# Altium PCB 123.PcbDoc
Units mm, origin at the board's own origin, x right, y up, seen from the top; angles counter-clockwise.
Board outline 152.4 x 101.6 mm, 2 copper layers (Top Layer, Bottom Layer); 33 components, 20 nets, 71 pads, 8 vias.
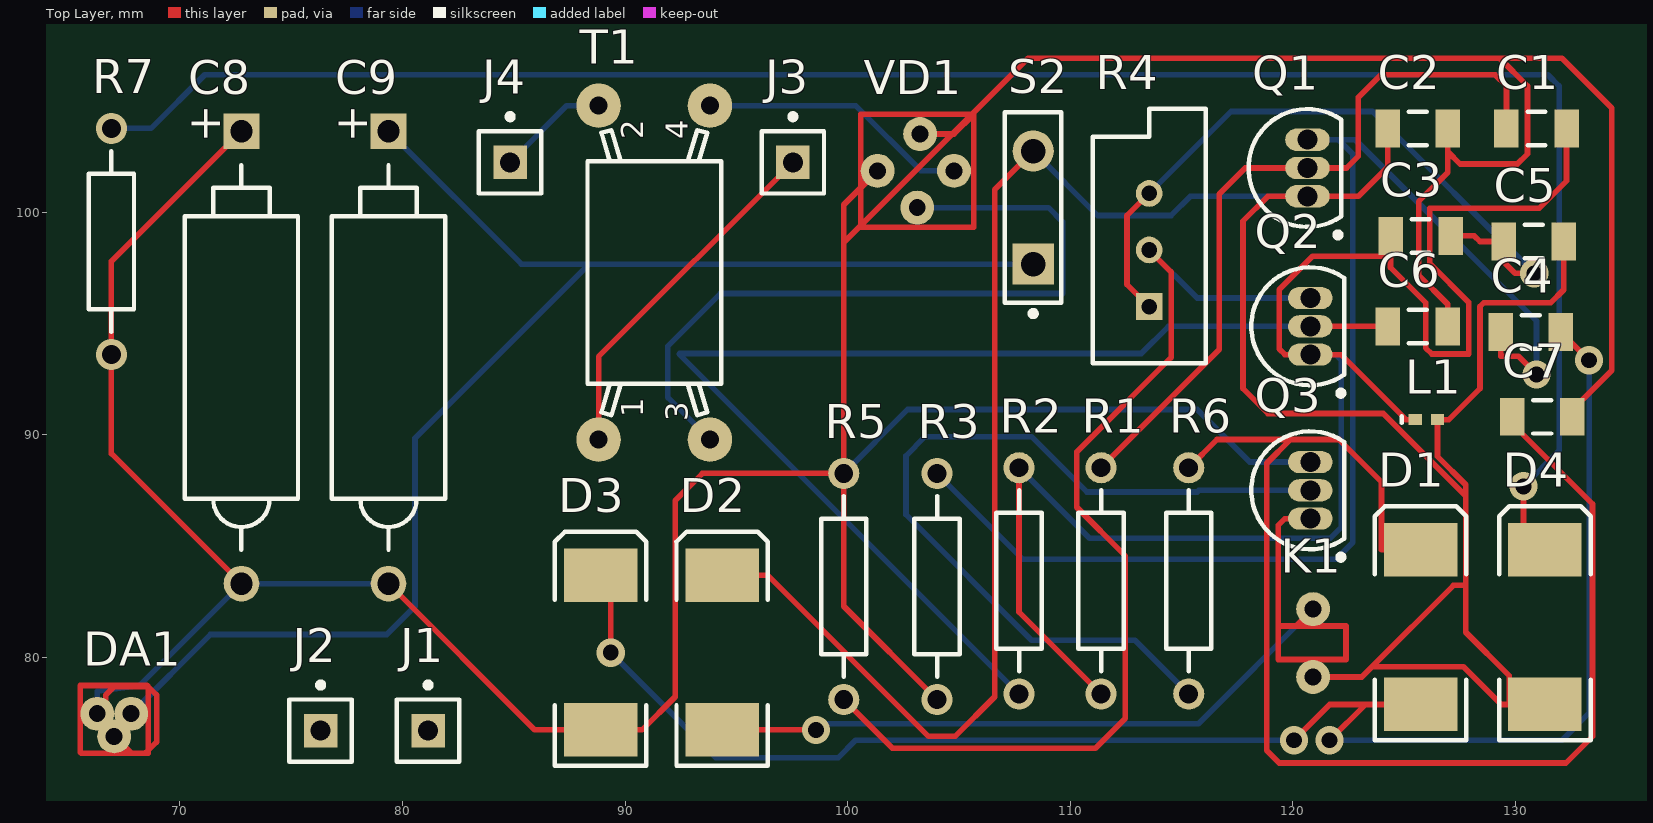
[diagram p0: Top Layer view]
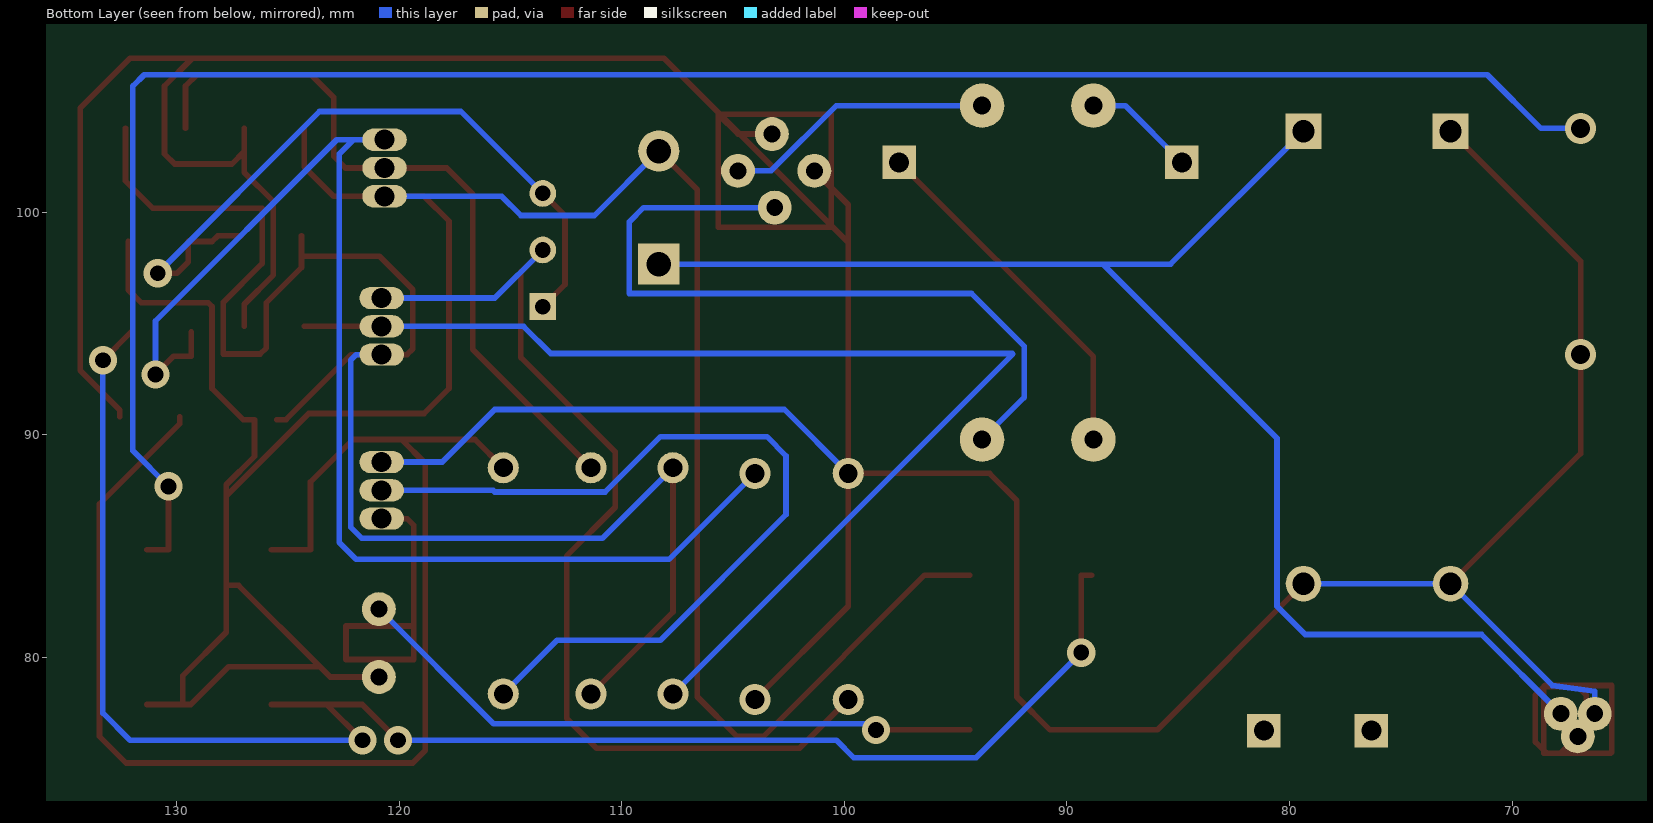
[diagram p1: Bottom Layer view, seen from below]

## Layer stack, top to bottom
Top Solder: solder mask 0.0102, Solder Resist, Dk 3.5
Top Layer: signal copper 0.0356
Dielectric 1: dielectric 0.32, FR-4, Dk 4.8
Bottom Layer: signal copper 0.0356
Bottom Solder: solder mask 0.0102, Solder Resist, Dk 3.5

## Board outline
25.4,25.4 177.8,25.4 177.8,127 25.4,127

## Design rules (kind name [scope] priority, off if disabled: settings)
Clearance [All] p1: gap=0.254 ignorepadtopadclearanceinfootprint=FALSE except(0: Arc-Hole Track-Hole SMDPad-Hole THPad-Hole Via-Hole Fill-Hole Poly-Hole Region-Hole Text-Hole)
PolygonConnect [All] p1: connectstyle=Relief reliefconductorwidth=0.254 reliefentries=4 polygonreliefangle="90 Angle" airgapwidth=0.254
RoutingVias [All] p1: holewidth=0.711 width=1.27 viastyle="Through Hole" minholewidth=0.711 minwidth=1.27 maxholewidth=0.711 maxwidth=1.27
SolderMaskExpansion [All] p1: expansion=0.102 istentingtop=FALSE
Width [All] p1: maxlimit=0.254 minlimit=0.254 preferedwidth=0.254
30 further rules are at their usual default settings.

## Components (designator, comment, footprint, x,y, rotation, side; value= is the part's Value field where it differs from the comment)
C1 "Cap Semi" C1206 130.937,103.759 r0 top value=100pF
C2 "Cap Semi" C1206 125.603,103.759 r0 top value=100pF
C3 "Cap Semi" C1206 125.73,98.933 r0 top value=100pF
C4 "Cap Semi" C1206 130.683,94.615 r0 top value=100pF
C5 "Cap Semi" C1206 130.81,98.679 r0 top value=100pF
C6 "Cap Semi" C1206 125.603,94.869 r0 top value=100pF
C7 "Cap Semi" C1206 131.191,90.805 r0 top value=100pF
C8 "Cap Pol2" POLAR0.8 72.771,93.472 r90 top value=100pF
C9 "Cap Pol2" POLAR0.8 79.375,93.472 r90 top value=100pF
D1 "Diode" SMC 125.73,81.361 r90 top
D2 "Diode" SMC 94.361,80.218 r90 top
D3 "Diode" SMC 88.9,80.218 r90 top
D4 "Diode" SMC 131.318,81.361 r90 top
DA1 "KP142EH8B" "PCBComponent_1 - duplicate" 66.167,78.105 r0 top
J1 "Socket" PIN1 81.153,76.708 r0 top
J2 "Socket" PIN1 76.327,76.708 r0 top
J3 "Socket" PIN1 97.536,102.235 r0 top
J4 "Socket" PIN1 84.836,102.235 r0 top
K1 "PEC16" "PCBComponent_1 - duplicate1" 120.142,80.645 r0 top
L1 "Inductor" 0402-A 125.992,90.678 r0 top value=10mH
Q1 "NPN" TO-226-AA 120.65,101.981 r0 top
Q2 "NPN" TO-226-AA 120.777,94.869 r0 top
Q3 "NPN" TO-226-AA 120.777,87.503 r0 top
R1 "Res2" AXIAL-0.4 111.379,83.439 r90 top value=1K
R2 "Res2" AXIAL-0.4 107.696,83.439 r90 top value=1K
R3 "Res2" AXIAL-0.4 104.013,83.185 r90 top value=1K
R4 "RPot" VR5 113.538,98.298 r90 top value=1K
R5 "Res2" AXIAL-0.4 99.822,83.185 r90 top value=1K
R6 "Res2" AXIAL-0.4 115.316,83.439 r90 top value=1K
R7 "Res2" AXIAL-0.4 66.929,98.679 r90 top value=1K
S2 "SW-SPST" SPST-2 108.331,100.203 r90 top
T1 "Trans" TRANS 91.313,97.282 r90 top
VD1 "КЦ405A" PCBComponent_1 101.346,102.743 r0 top

## Footprints (in the part's own frame and the unit in brackets; to place one, negate y for a bottom-side part, rotate by r counter-clockwise, add the part's x,y. Pads: shape width x height; smd on the part's side, far side on the other; paste and mask are expansions set on the pad)
0402-A [mm] "Chip Inductor, Body 1.0x0.5mm, IPC High Density"
  rect 0.6x0.5 smd: 1(-0.5,0) 2(0.5,0)
  silkscreen extent -1.1,-0.15 -1.1,0.15, body extent -0.55,-0.3 0.55,0.3, height 0.55
AXIAL-0.4 [mm] "Axial Device, Thru-Hole; 2 Leads; 0.4 in Pin Spacing"
  round 1.4 hole 0.85: 1(-5.08,0) 2(5.08,0)
  silkscreen extent -4.06,-1.02 4.06,1.02
C1206 [mm] "Chip Capacitor, Body 3.2x1.6mm, IPC High Density"
  rect 1.1x1.7 smd: 1(-1.35,0) 2(1.35,0)
  silkscreen extent -0.4,-0.75 0.4,0.75, body extent -1.7,-0.9 1.7,0.9, height 1.3
PCBComponent_1 [mil]
  round 60 hole 30: 1(0,-35) 2(75,30) 3(135,-35) 4(70,-100)
  Top Layer lines w10: -30,-135 -30,-131.85 -30,-65 -30,-35 -30,61.85 ; -30,65 75,65 166.85,65 ; -26.85,-135 170,-135 ; 170,-131.85 170,65
"PCBComponent_1 - duplicate" [mil]
  round 60 hole 30: 1(5,-25) 2(35,-65) 3(65,-25)
  Top Layer lines w10: -25,-93.11 -25,-25 -25,25 93.11,25 ; -23.11,-95 35,-95 65,-95 90,-95 95,-95 95,-90 95,23.11
"PCBComponent_1 - duplicate1" [mil]
  round 60 hole 30: 1(30,60) 2(30,-60)
  Top Layer lines w10: -31.89,-29.06 -31.89,30 ; -30,-29.06 88.11,-29.06 88.11,30 30,30 0,30 -30,30
PIN1 [mm] "Connector; Plug"
  rect 1.5x1.5 hole 0.9: 1(0,0)
  silkscreen extent -1.4,-1.4 1.4,2.17
POLAR0.8 [mm] "Polarized Capacitor; 2 Leads"
  rect 1.6x1.6 hole 1: 1(10.16,0)
  round 1.6 hole 1: 2(-10.16,0)
  silkscreen extent -8.64,-2.54 8.64,2.54
SMC [mm] "DO-214-AB/SMC; 2 C-Bend Leads; Body 7.9 x 5.9 mm, inc. leads (LxW)"
  rect 2.4x3.3 smd: 1(-3.475,0) 2(3.475,0)
  silkscreen extent -5.07,-2.05 5.43,2.06
SPST-2 [mm] "Switch; 2 Leads"
  rect 1.85x1.85 hole 1.1: 1(-2.54,0)
  round 1.85 hole 1.1: 2(2.54,0)
  silkscreen extent -4.89,-1.27 4.28,1.27
TO-226-AA [mm] "TO, Flat Index; 3 In-Line, Axial Leads; Body Dia. 4.8mm; Leads 0.55 x 0.51 mm (max)"
  oval 2x1 hole 0.9: 1(0,-1.27) 2(0,0) 3(0,1.27)
  silkscreen extent -2.65,-3.13 1.52,2.65, body extent -2.65,-2.66 1.52,2.66, height 5.33
TRANS [mm] "Transformer; 4 Leads"
  round 2 hole 0.8: 1(-7.5,2.5) 2(7.5,2.5) 3(-7.5,-2.5) 4(7.5,-2.5)
  silkscreen extent -6.4,-3 6.4,3
VR5 [mm] "Thru-Hole; 3 Leads"
  rect 1.2x1.2 hole 0.7: 1(-2.54,0)
  round 1.2 hole 0.7: 2(0,0) 3(2.54,0)
  silkscreen extent -5.08,-2.54 6.35,2.54

## Part data
C1 C2 C3 C4 C5 C6 C7: "Capacitor (Semiconductor SIM Model)", LatestRevisionDate=29-May-2009, LatestRevisionNote="IPC-7351 Footprint Added.", PackageDescription="Chip Capacitor", PackageReference=C1206, Published=8-Jun-2000, Publisher="Altium Limited"
C8 C9: "Polarized Capacitor (Axial)", LatestRevisionDate=17-Jul-2002, LatestRevisionNote="Re-released for DXP Platform.", PackageDescription="Polarized Capacitor; 2 Leads", PackageReference=POLAR0.8, Published=8-Jun-2000, Publisher="Altium Limited"
D1 D2 D3 D4: "Default Diode", Code_JEDEC=DO-214-AB, LatestRevisionDate=17-Jul-2002, LatestRevisionNote="Re-released for DXP Platform.", PackageDescription="DO-214-AB/SMC; 2 C-Bend Leads; Body 7.9 x 5.9 mm, inc. leads (LxW)", PackageReference=SMC, PackageVersion=Sep-1996, Published=8-Jun-2000, Publisher="Altium Limited"
Q1 Q2 Q3: "NPN Bipolar Transistor", Code_JEDEC=TO-226-AA, LatestRevisionDate=17-Jul-2002, LatestRevisionNote="Re-released for DXP Platform.", PackageDescription="TO, Flat Index; 3 In-Line, Axial Leads; Body Dia. 4.8mm; Leads 0.55 x 0.51 mm (max)", PackageReference=TO-226-AA, Published=8-Jun-2000, Publisher="Altium Limited"
R1 R2 R3 R5 R6 R7: "Resistor", LatestRevisionDate=17-Jul-2002, LatestRevisionNote="Re-released for DXP Platform.", PackageDescription="Axial Device, Thru-Hole; 2 Leads; 0.4 in Pin Spacing", PackageReference=AXIAL-0.4, Published=8-Jun-2000, Publisher="Altium Limited"
R4: "Potentiometer", LatestRevisionDate=17-Jul-2002, LatestRevisionNote="Re-released for DXP Platform.", PackageDescription="Variable Resistor, Thru-Hole; 3 Leads", PackageReference=VR5, Published=8-Jun-2000, Publisher="Altium Limited", Set Position=0.5, Sim Note="Enter the Resistance value and the set point into parameter fields."
S2: "Single-Pole, Single-Throw Switch", LatestRevisionDate=17-Jul-2002, LatestRevisionNote="Re-released for DXP Platform.", PackageDescription="Switch; 2 Leads", PackageReference=SPST-2, Published=24-Mar-1999, Publisher="Altium Limited"
T1: "Transformer", LatestRevisionDate=08-Jul-2005, LatestRevisionNote="Mech Layer 1 removed.", PackageDescription="Transformer; 4 Leads", PackageReference=TRANS, Published=24-Mar-1999, Publisher="Altium Limited"
J1 J2 J3 J4: LatestRevisionDate=17-Jul-2002, LatestRevisionNote="Re-released for DXP Platform.", Publisher="Altium Limited"
L1: Code_IEC=1005, Code_JEITA=0402, LatestRevisionDate=29-May-2009, LatestRevisionNote="IPC-7351 Footprint Added.", PackageDescription="Chip Inductor", PackageReference=0402-A, Published=8-Jun-2000, Publisher="Altium Limited"

## Via types
v1: diameter 1.27, hole 0.711, Top Layer to Bottom Layer, 8 vias

## Nets (pads, with @x,y where several pads share a name; then routed paths per layer and width w, separated by ;. In a path a pad name is that pad's centre, name@x,y a point inside that pad or via, vN(x,y) a via of type N, cw(c..) or ccw(c..) an arc to the next point about the centre after c; other vN are vias at no path point)
GND: C2.2 C6.2 C7.2 C8.1 C8.2 C9.2 D3.1 DA1.1 DA1.2 Q3.3 R3.1 R5.2 R7.1 VD1.1 VD1.2 | length 207
  Top Layer w0.254: 65.532,75.74 65.58,75.692 ; DA1.1 66.675,77.851 66.675,78.311 67.056,78.692 68.58,78.692 ; DA1.2 67.818,75.692 68.453,75.692 68.58,75.819 68.961,76.2 68.961,78.311 68.58,78.692 ; 68.532,78.74 68.58,78.692 ; C8.2 66.929,89.154 R7.1 66.929,97.79 C8.1 ; C9.2 85.944,76.743 D3.1 90.764,76.743 92.253,78.232 92.253,87.046 93.472,88.265 R5.2 ; 100.584,99.314 100.664,99.314 ; 100.584,104.314 100.584,104.394 ; VD1.1 100.584,101.092 99.822,100.33 99.822,98.632 ; VD1.2 104.695,103.505 ; R3.1 99.822,82.296 R5.2 ; 105.664,99.314 105.664,99.394 ; 105.664,104.394 104.775,103.505 104.695,103.505 ; C6.2 126.953,95.861 125.641,97.173 125.641,100.47 126.953,101.782 126.953,102.714 ; C2.2 126.953,102.714 ; C7.2 132.541,91.11 134.315,92.884 134.315,104.673 132.08,106.909 129.286,106.909 ; R5.2 99.822,98.632 ; 99.822,98.632 100.584,99.394 104.695,103.505 ; 104.695,103.505 105.584,104.394 108.099,106.909 129.286,106.909 ; 126.953,102.714 127.508,102.159 130.073,102.159 130.531,102.616 130.531,105.664 129.286,106.909
  Bottom Layer w0.254: DA1.1 66.294,78.486 68.199,78.74 C8.2 C9.2 ; R5.2 102.692,91.135 115.697,91.135 118.059,88.773 Q3.3
NetC1_1: C1.1 Q1.2 R1.2 | length 33.3
  Top Layer w0.254: R1.2 116.688,93.828 116.688,100.813 117.856,101.981 Q1.2 122.403,101.981 122.936,102.514 122.936,105.156 123.952,106.172 129.079,106.172 129.587,105.664 C1.1
NetC1_2: C1.2 C3.1 L1.1 Q2.1 R1.1 R2.2 | length 76.4
  Top Layer w0.254: R2.2 107.696,82.042 R1.1 ; C3.1 124.38,98.015 ; L1.1 125.07,90.678 122.149,93.599 Q2.1 119.634,93.599 119.38,93.853 119.38,96.52 120.875,98.015 124.38,98.015 ; C1.2 132.287,101.401 131.064,100.178 126.149,100.178 126.149,97.688 127.889,95.948 127.889,93.624 126.238,93.624 125.959,93.904 125.959,95.936 124.38,97.514 124.38,98.015
  Bottom Layer w0.254: R2.2 110.871,85.344 121.666,85.344 122.174,85.852 122.174,93.345 121.92,93.599 Q2.1
NetC2_1: C2.1 C5.2 D2.2 D4.1 K1.2 L1.2 Q1.1 S2.2 | length 127.4
  Top Layer w0.254: D2.2 96.393,83.693 103.632,76.454 104.826,76.454 106.604,78.232 106.604,101.016 S2.2 ; K1.2 123.088,79.121 123.546,79.578 ; C2.1 124.253,102.028 122.936,100.711 Q1.1 118.872,100.711 117.754,99.593 117.754,92.075 118.872,90.957 124.054,90.957 127.762,87.249 ; D4.1 D4.1@129.718,77.886 ; C5.2 132.16,96.512 131.572,95.924 128.563,95.924 128.397,95.758 128.397,92.075 127,90.678 L1.2 126.492,89.027 127.762,87.757 127.762,87.249 ; 123.546,79.578 127.203,83.236 127.762,83.236 ; 123.546,79.578 127.66,79.578 129.353,77.886 D4.1@129.718,77.886 ; 127.762,83.236 127.762,87.249 ; 127.762,83.236 127.762,81.128 129.718,79.172 D4.1@129.718,77.886
  Bottom Layer w0.254: S2.2 111.227,99.847 114.529,99.847 115.392,100.711 Q1.1
NetC3_2: C3.2 C5.1 R4.1 R4.3 | length 32.7
  Top Layer w0.254: R4.1 112.547,96.749 112.547,99.847 R4.3 ; C3.2 128.143,98.933 128.397,98.679 C5.1 129.46,97.768 129.972,97.257 v1(130.835,97.257)
  Bottom Layer w0.254: R4.3 117.221,104.521 123.571,104.521 v1(130.835,97.257)
NetC4_1: C4.1 Q1.3 R3.2 | length 58
  Top Layer w0.254: C4.1 129.333,93.523 130.124,93.523 v1(130.937,92.71)
  Bottom Layer w0.254: R3.2 107.874,84.404 121.92,84.404 122.682,85.166 122.682,102.616 122.047,103.251 ; Q1.3 122.047,103.251 ; v1(130.937,92.71) 130.937,95.111 122.797,103.251 122.047,103.251
NetC4_2: C4.2 D1.1 D3.2 | length 75.3
  Top Layer w0.254: D3.2 89.357,83.693 v1(89.357,80.213) ; v1(120.04,76.276) 121.65,77.886 123.25,77.886 ; v1(121.641,76.276) 123.25,77.886 ; D1.1 123.25,77.886 ; C4.2 v1(133.299,93.349)
  Bottom Layer w0.254: v1(89.357,80.213) 94.07,75.5 99.581,75.5 100.357,76.276 v1(120.04,76.276) ; v1(121.641,76.276) 132.08,76.276 133.299,77.495 v1(133.299,93.349)
NetC6_1: C6.1 Q2.2 R2.1 | length 53.9
  Top Layer w0.254: Q2.2 C6.1
  Bottom Layer w0.254: R2.1 92.431,93.624 92.456,93.65 113.182,93.65 114.402,94.869 Q2.2
NetC7_1: C7.1 D1.2 R6.2 | length 60.4
  Top Layer w0.254: R6.2 116.586,89.789 119.888,89.789 ; D1.2 123.977,84.836 123.977,87.884 122.072,89.789 119.888,89.789 ; C7.1 129.841,90.5 133.452,86.89 133.452,76.454 132.258,75.26 119.38,75.26 118.821,75.819 118.821,88.722 119.888,89.789
NetC9_1: C9.1 DA1.3 S2.1 | length 64.8
  Bottom Layer w0.254: DA1.3 71.374,81.026 79.299,81.026 80.569,82.296 80.569,89.84 88.392,97.663 ; C9.1 85.344,97.663 88.392,97.663 ; S2.1 88.392,97.663
NetD2_1: D2.1 K1.1 Q3.1 | length 36.8
  Top Layer w0.254: D2.1 v1(98.577,76.743) ; 119.332,79.907 119.38,79.907 ; 119.332,81.407 119.332,85.931 119.634,86.233 Q3.1 ; 119.38,81.407 120.142,81.407 K1.1
  Bottom Layer w0.254: v1(98.577,76.743) 98.847,77.013 115.748,77.013 K1.1
NetD4_2: D4.2 R7.2 | length 88.7
  Top Layer w0.254: v1(130.353,87.681) 130.353,84.836 D4.2
  Bottom Layer w0.254: R7.2 68.707,103.759 71.12,106.172 131.445,106.172 131.953,105.664 131.953,89.281 v1(130.353,87.681)
NetJ1_1: J1.1
NetJ2_1: J2.1
NetJ3_1: J3.1 T1.1 | length 16.1
  Top Layer w0.254: T1.1 88.813,93.512 J3.1
NetJ4_1: J4.1 T1.2 | length 5
  Bottom Layer w0.254: J4.1 87.383,104.782 T1.2
NetQ2_3: Q2.3 R4.2 R5.1 | length 46.3
  Top Layer w0.254: R5.1 102.006,75.921 111.125,75.921 112.471,77.267 112.471,84.557 110.287,86.741 110.287,89.23 114.529,93.472 114.529,97.307 R4.2
  Bottom Layer w0.254: R4.2 115.697,96.139 Q2.3
NetQ3_2: Q3.2 R6.1 | length 38.3
  Bottom Layer w0.254: R6.1 112.903,80.772 108.255,80.772 102.616,86.411 102.616,89.052 103.48,89.916 108.255,89.916 110.744,87.427 115.697,87.427 115.773,87.503 Q3.2
NetT1_3: T1.3 VD1.4 | length 33.7
  Bottom Layer w0.254: T1.3 91.923,91.672 91.923,93.98 94.285,96.342 109.652,96.342 109.652,99.568 109.017,100.203 VD1.4
NetT1_4: T1.4 VD1.3 | length 12.2
  Bottom Layer w0.254: T1.4 100.358,104.782 103.286,101.854 VD1.3

## Text inside footprints (layer, text, board x,y; h text height)
C8: Top Overlay "+" at 71.821,103.124 h1.5 r90
C9: Top Overlay "+" at 78.425,103.124 h1.5 r90
T1: Top Overlay "1" at 90.813,90.782 h1 r90; Top Overlay "2" at 90.813,103.282 h1 r90; Top Overlay "3" at 92.813,90.607 h1 r90; Top Overlay "4" at 92.813,103.282 h1 r90